# Altium PCB 48V-5V Buck.PcbDoc
Units mil, origin at the board's own origin, x right, y up, seen from the top; angles counter-clockwise.
Board outline 1792.02 x 1443.98 mil, 4 copper layers (L1-TOP, L2-GND, L3-GND, L4-BOT), stack 64.961 mil thick; 33 components, 13 nets, 93 pads, 63 vias.
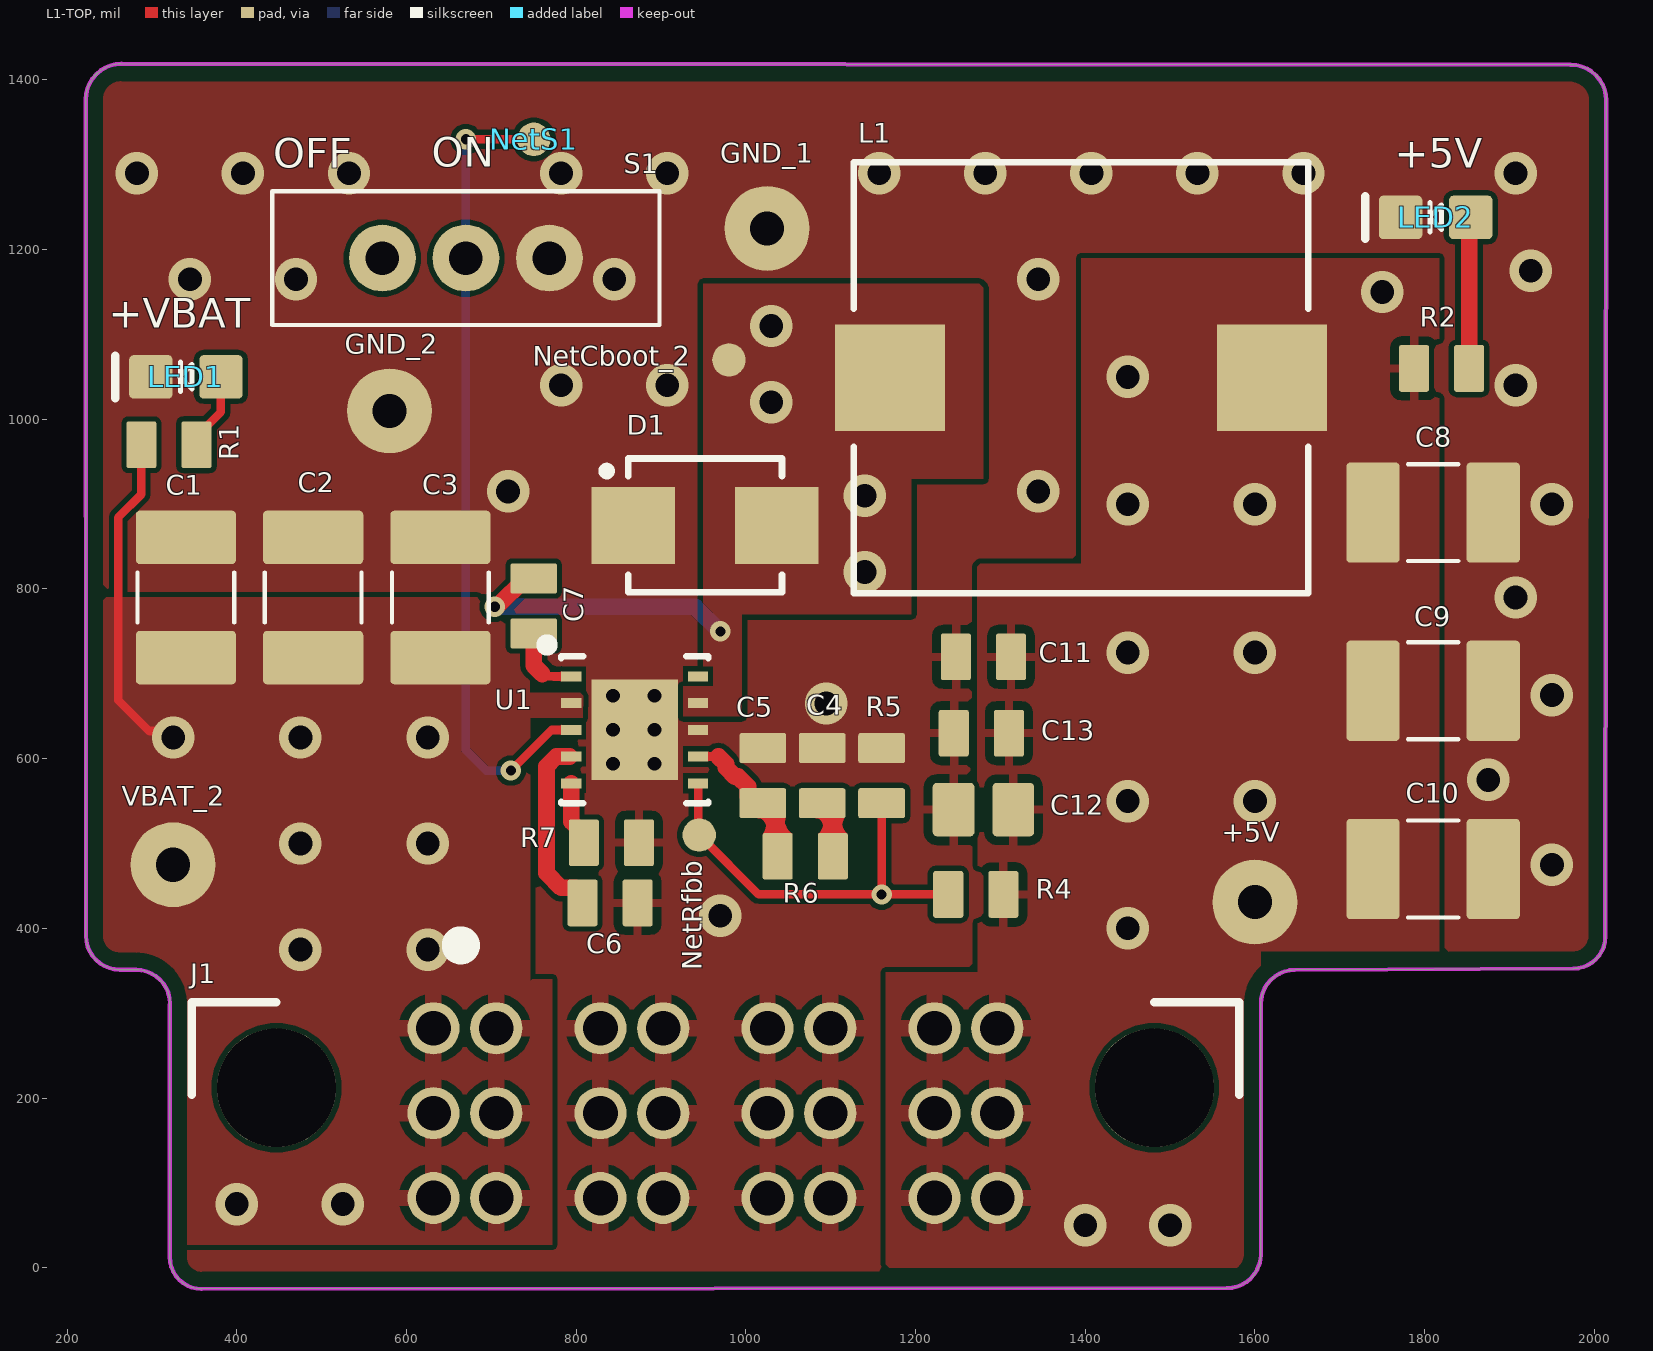
[diagram p0: L1-TOP view]
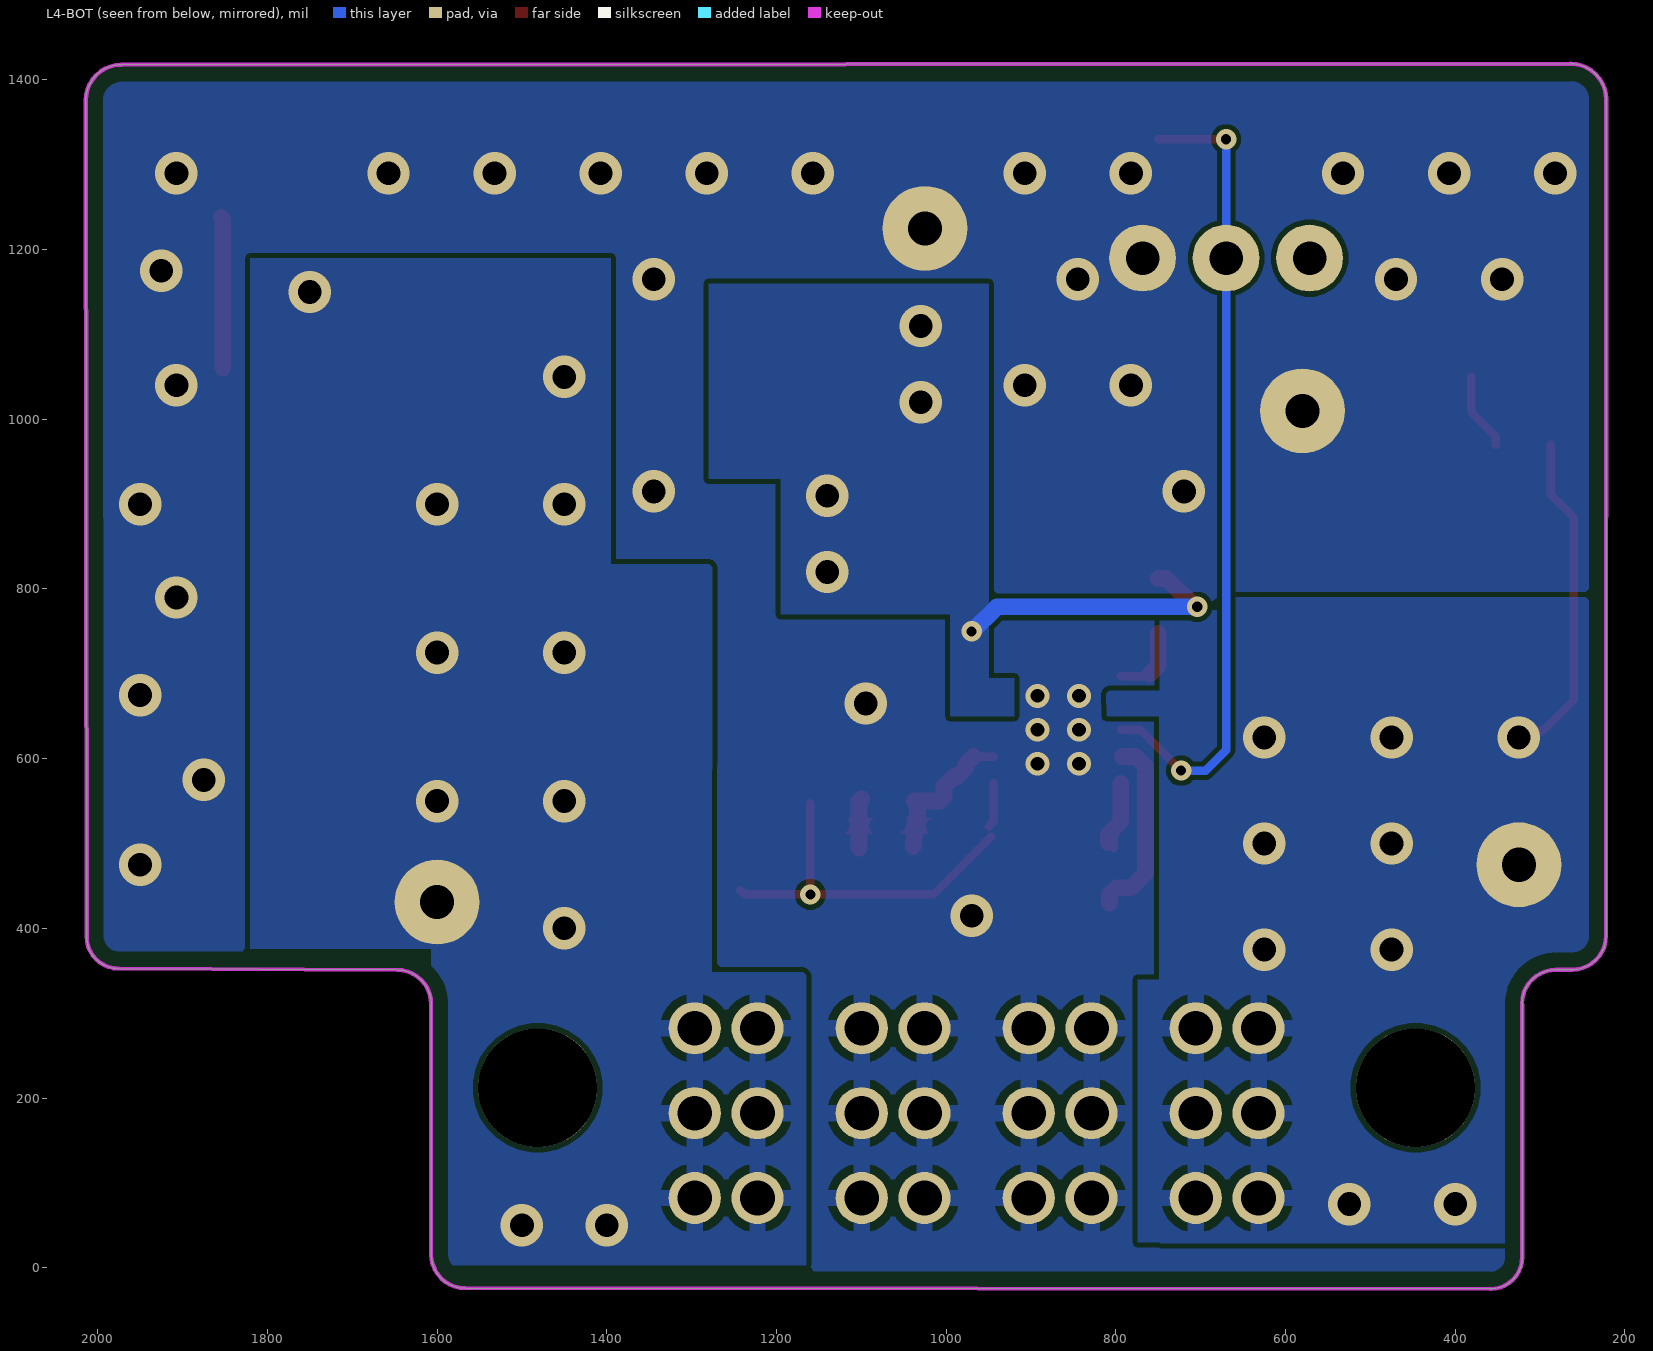
[diagram p1: L4-BOT view, seen from below]
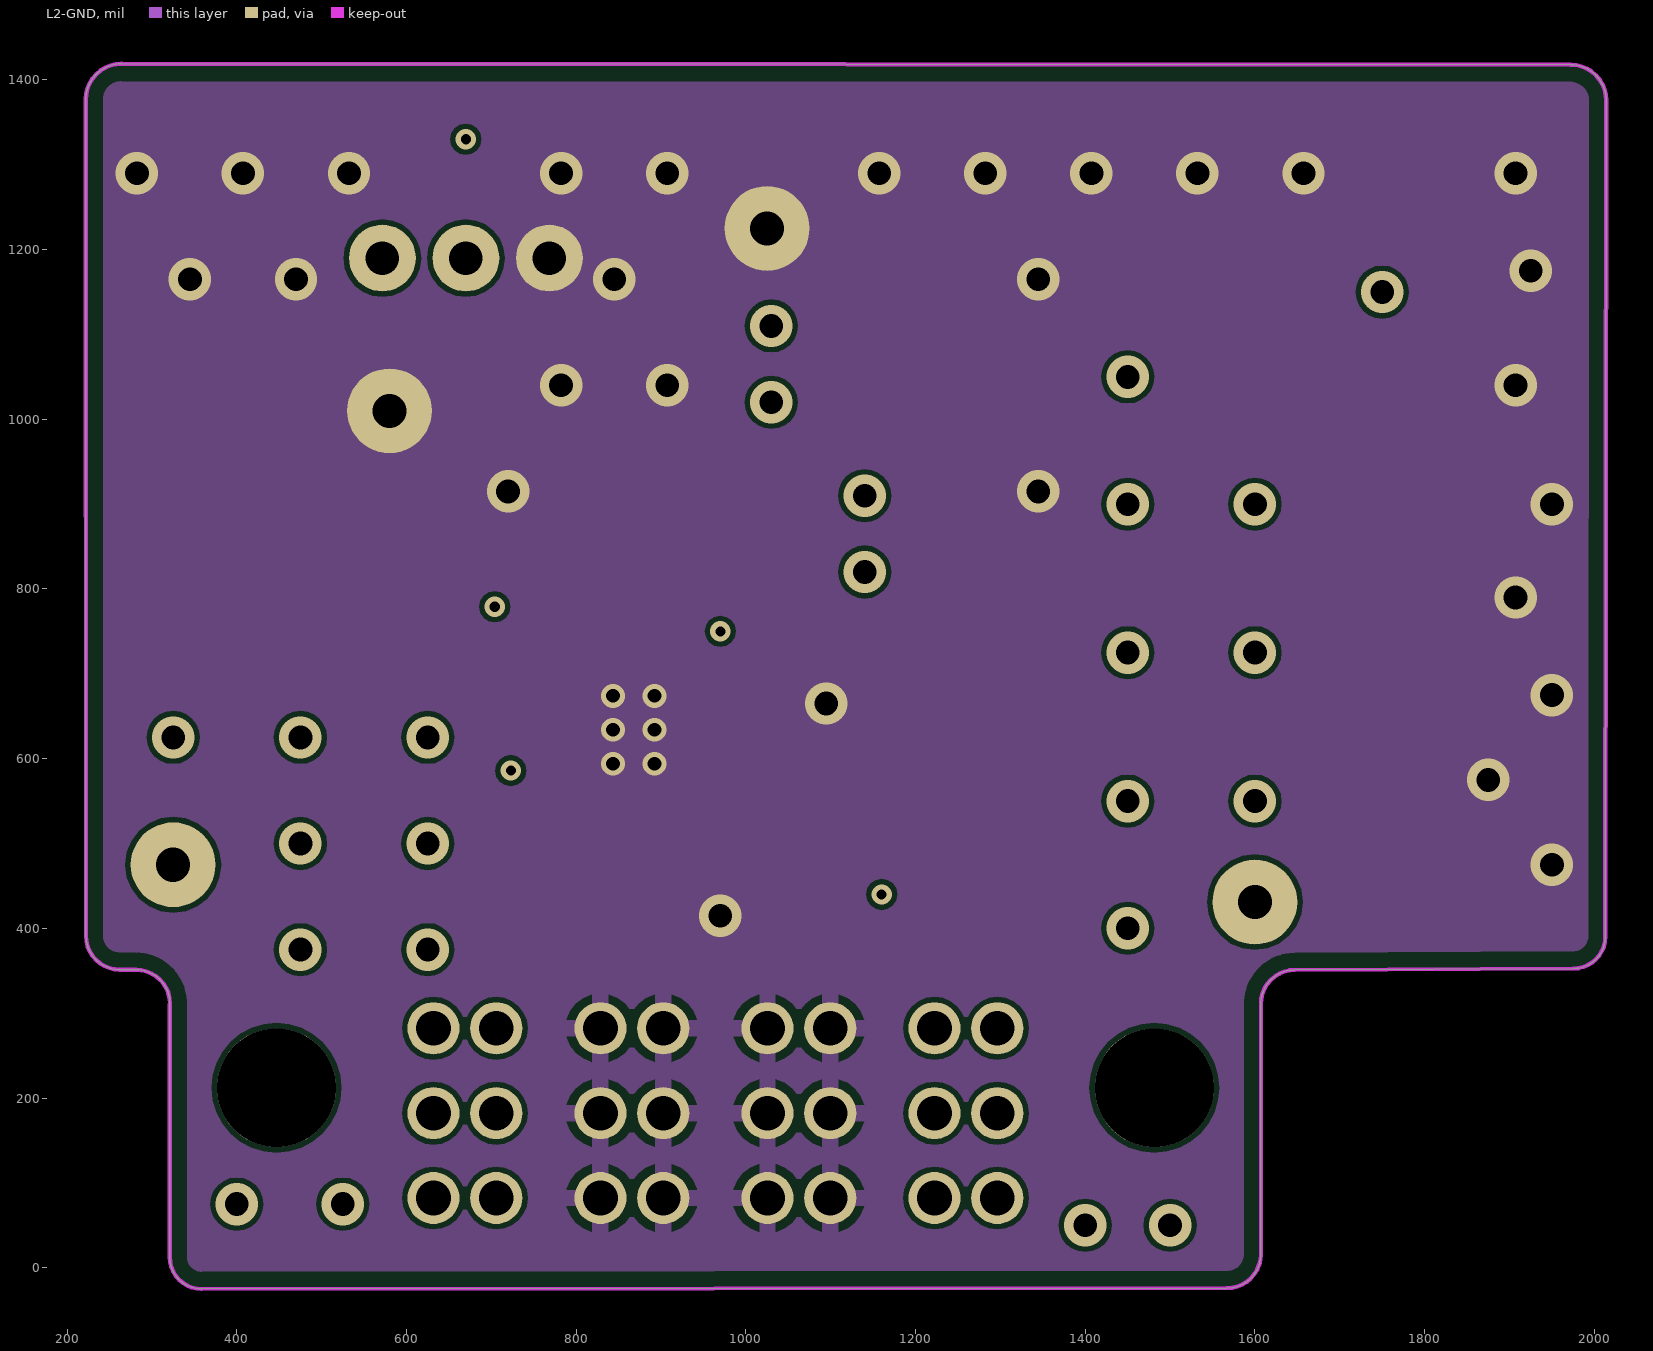
[diagram p2: L2-GND]
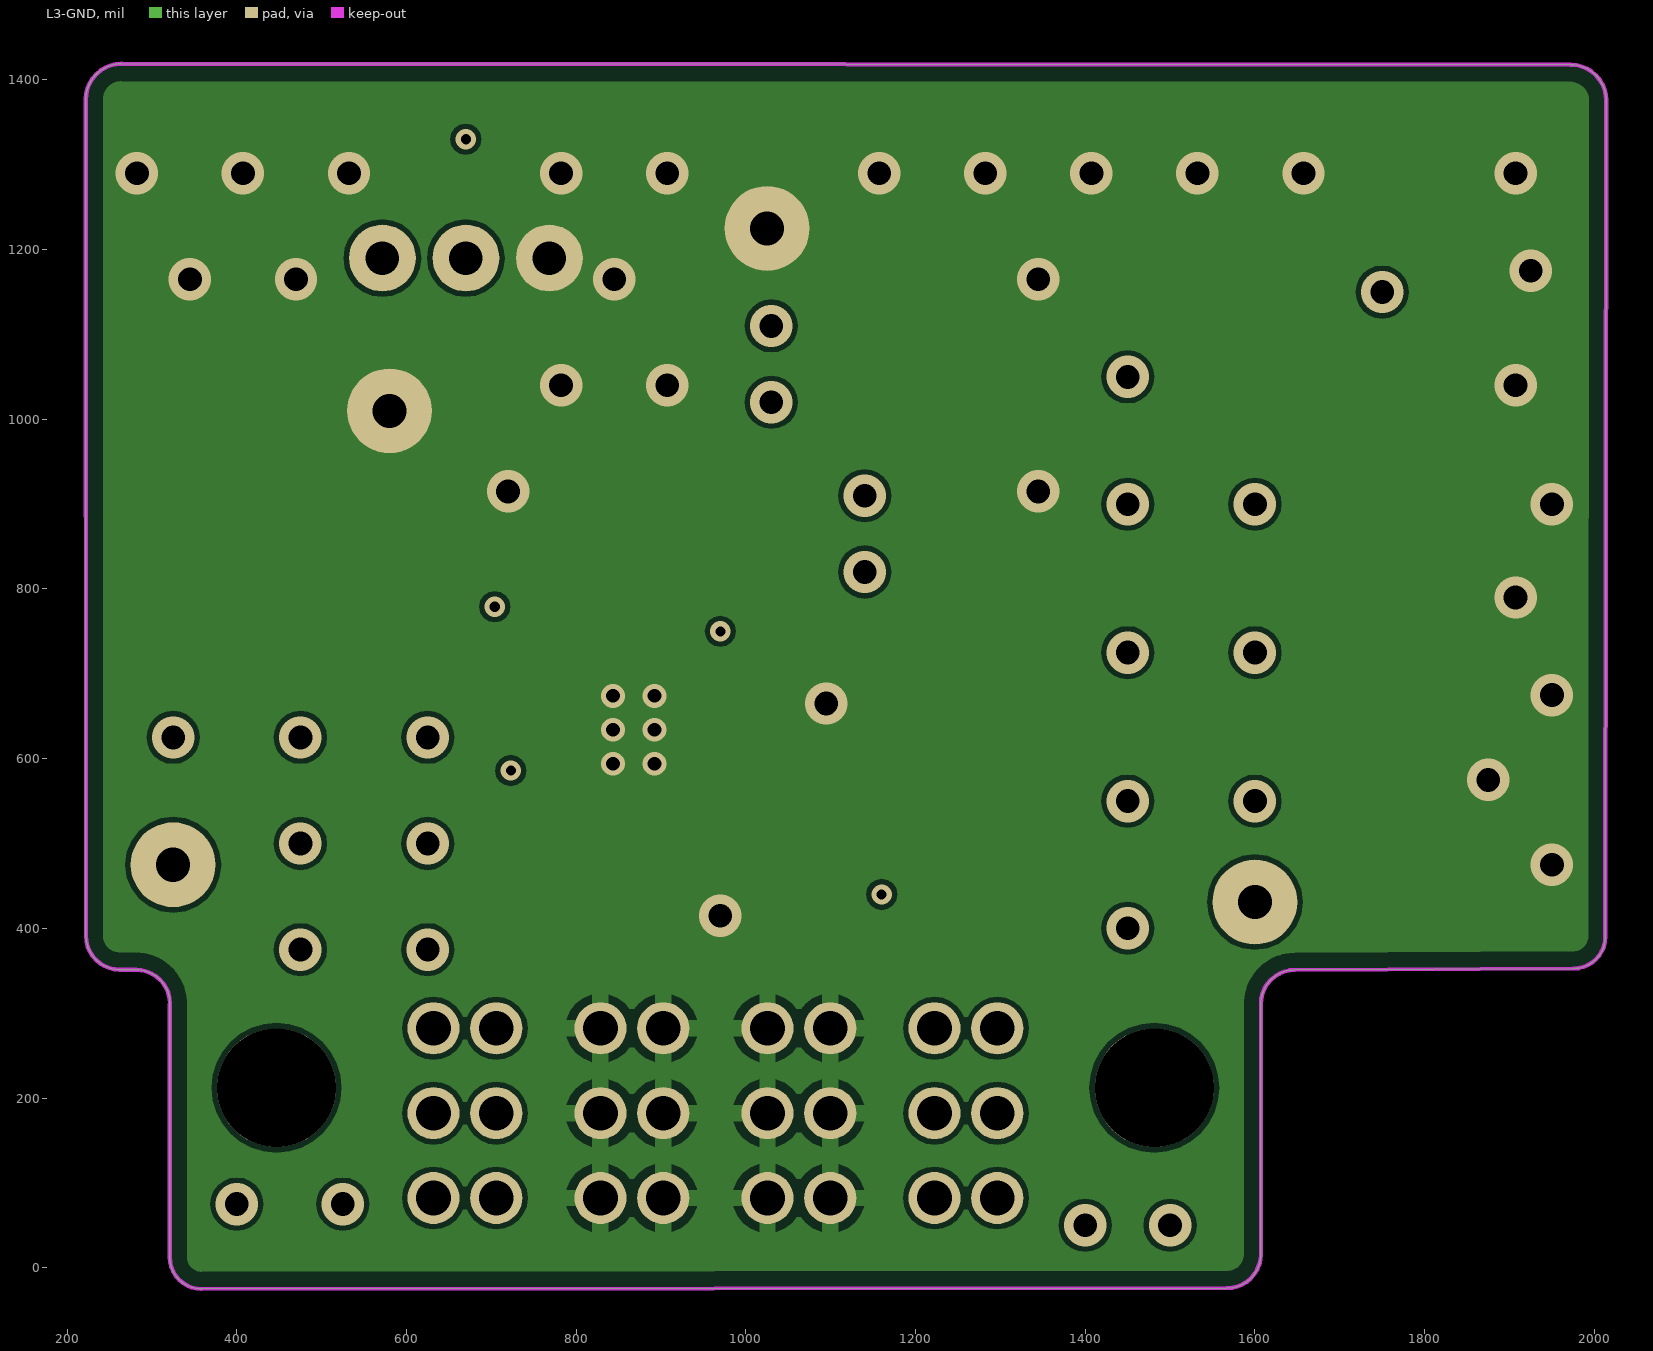
[diagram p3: L3-GND]
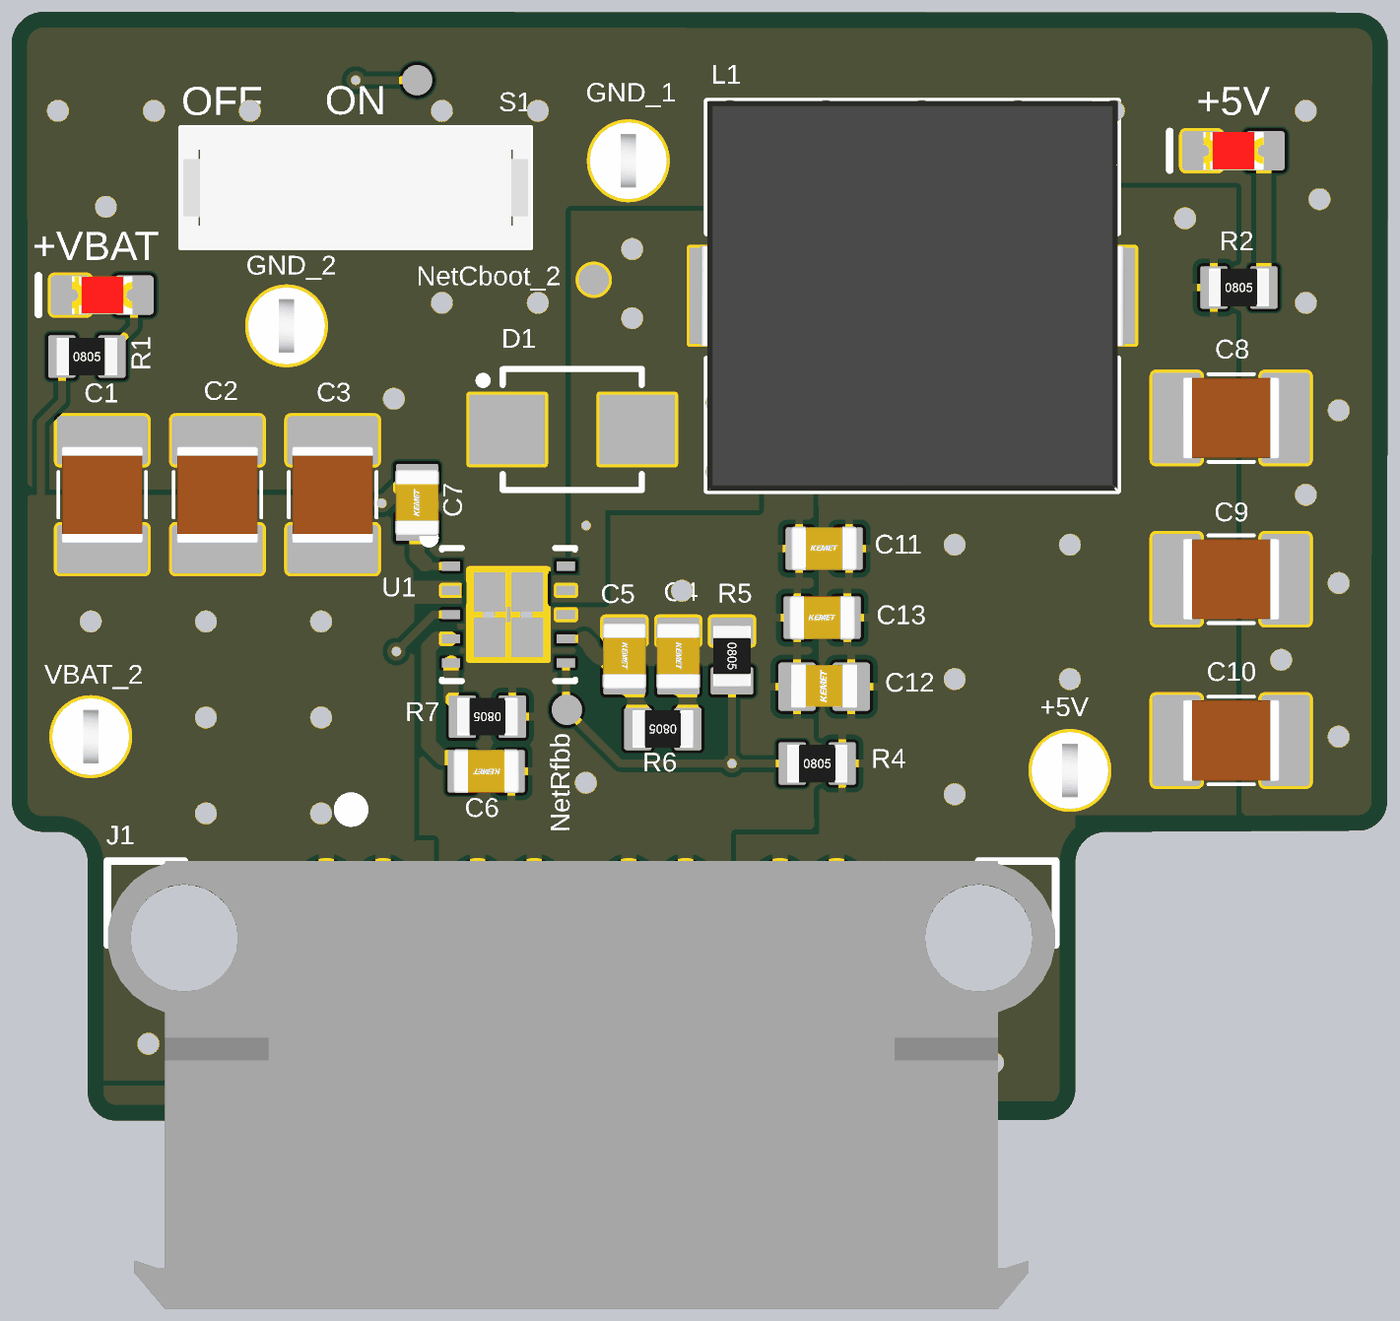
[diagram p4: 3D render of the assembled board from above, using the file's embedded part models]

## Layer stack, top to bottom
Top Solder: solder mask 0.5, Solder Resist, Dk 3.8
L1-TOP: signal copper 2.9531
Dielectric 2: prepreg 7.874, PP-006, Dk 4.6
L2-GND: signal copper 0.689
Dielectric 1: core 41.9291, FR-4, Dk 4.5
L3-GND: signal copper 0.689
Dielectric 3: prepreg 7.874, PP-006, Dk 4.6
L4-BOT: signal copper 2.9531
Bottom Solder: solder mask 0.5, Solder Resist, Dk 3.8

## Board outline
321,12.46 321,310.49 321.24,311.24 ccw(c281.24,311.24) 281.24,351.24 262.24,351.24 cw(c262.24,391.24) 222.25,391.24 222,1377 cw(c264.02,1377) 264.02,1419.03 1972,1418 cw(c1972,1375.98) 2014.02,1375.98 2012.99,390.28 cw(c1975.36,390.28) 1975.36,352.64 1647,351 ccw(c1647,311) 1607,311 1607,16 cw(c1567,16) 1567,-24 358.42,-24.96 cw(c358.42,12.46)

## Design rules (kind name [scope] priority, off if disabled: settings)
BoardOutlineClearance [All] p1: gap=20 ignorepadtopadclearanceinfootprint=FALSE
Clearance [All] p1: gap=6 ignorepadtopadclearanceinfootprint=TRUE
HoleSize [All] p1: absolutevalues=TRUE maxlimit=200 minlimit=1 maxpercent=80.000 minpercent=20.000
MinimumSolderMaskSliver [All] p1: minsoldermaskwidth=1
PlaneConnect [All] p1: pad.planeconnectstyle=Relief pad.reliefexpansion=20 pad.reliefentries=4 pad.reliefconductorwidth=10 pad.reliefairgap=10 via.planeconnectstyle=Direct via.reliefexpansion=20 via.reliefentries=4 via.reliefconductorwidth=10 via.reliefairgap=10
PolygonConnect COMP_NET_DIRECT [(InComponent('C4') OR InComponent('C5') OR InComponent('R5'))] p1: connectstyle=Direct reliefconductorwidth=10 reliefentries=4 polygonreliefangle="90 Angle" airgapwidth=10
PolygonConnect CONN_Releif [InComponent('J1')] p2: connectstyle=Relief reliefconductorwidth=20 reliefentries=4 polygonreliefangle="90 Angle" airgapwidth=10
PolygonConnect PolygonConnect_SMALL [(HasFootprint('CAP0805') OR HasFootprint('CAP0603') OR HasFootprint('RES0603') OR HasFootprint('RES0805') OR HasFootprint('CAP2012') OR HasFootprint('SOD-923') OR HasFootprint('SOD-128'))] p3: connectstyle=Relief reliefconductorwidth=10 reliefentries=4 polygonreliefangle="90 Angle" airgapwidth=10
PolygonConnect PolygonConnect_VIA [IsVIA] p4: connectstyle=Direct reliefconductorwidth=20 reliefentries=4 polygonreliefangle="90 Angle" airgapwidth=10
PolygonConnect [All] p5: connectstyle=Direct reliefconductorwidth=10 reliefentries=4 polygonreliefangle="90 Angle" airgapwidth=10
RoutingVias [All] p1: holewidth=12 width=24 viastyle="Through Hole" minholewidth=12 minwidth=24 maxholewidth=28 maxwidth=50
SilkToSilkClearance [All] p1: silktosilkclearance=1
SilkToSolderMaskClearance [HasFootprint('LED_0805_RED')] p1: minsilkscreentomaskgap=1 clearancetoexposedcopper=TRUE
SolderMaskExpansion SolderMaskExpansion_1 [IsVia] p1: expansion=4 istentingtop=TRUE
SolderMaskExpansion [All] p2: expansion=4 istentingtop=FALSE
Width [All] p1: maxlimit=50 minlimit=6 preferedwidth=6 midlayer1_maxwidth=10 midlayer2_maxwidth=10 minimp=50.000000 maximp=50.000000 favimp=50.000000
25 further rules are at their usual default settings.

## Components (designator, comment, footprint, x,y, rotation, side; value= is the part's Value field where it differs from the comment)
+5V "TESTPOINT_LOOP" TESTPOINT_LOOP 1600,431 r90 top
C1 "CAP_2.2uF_100V_1210_1" CAPC3225X270N 340,790 r270 top value=2.2μF
C2 "CAP_2.2uF_100V_1210_1" CAPC3225X270N 490,790 r270 top value=2.2μF
C3 "CAP_2.2uF_100V_1210_1" CAPC3225X270N 640,790 r270 top value=2.2μF
C4 "CAP_6.8nF_100V_0805" CAP0805 1090,580 r270 top value=6.8nF
C5 "CAP_68pF_50V_0805" CAP0805 1020,580 r270 top value=68pF
C6 "CAP_2.7nF_50V_0805" CAP0805 840,430 r180 top value=2.7nF
C7 "CAP_0.1uF_10V_0805" CAP0805 750,780 r90 top value=0.1uF
C8 "CAP_47uF_16V_1210" CAPC3225X270N 1810,890 r180 top value=47μF
C9 "CAP_47uF_16V_1210" CAPC3225X270N 1810,680 r180 top value=47μF
C10 "CAP_47uF_16V_1210" CAPC3225X270N 1810,470 r180 top value=47μF
C11 "CAP_0.1uF_100V_0805" CAP0805 1280,720 r0 top value=0.1µF
C12 "CAP_1uF_50V_0805" CAP2012 1280,540 r0 top value=1μF
C13 "CAP_4.7uF_50V_0805" CAP0805 1277.52,630 r0 top value=4.7μF
D1 "DIO_SCHOTTKY_100V_5.5A" DIO_SCHOTTKY_45V_5A_vF480mV 952,875 r0 top
GND_1 "TESTPOINT_LOOP" TESTPOINT_LOOP 1025,1225 r90 top
GND_2 "TESTPOINT_LOOP" TESTPOINT_LOOP 580,1010 r90 top
J1 "CON_2POS_SCREW_TERM" MPT-04-01-01-L-RA-SD 964.06,-30 r0 top locked
L1 "IND_8.2uH_8.5A" IND_8.2uH_8.5A 1395,1049 r0 top value=8.2μH
LED1 "LED_RED" LED_0805_RED 340,1050 r180 top
LED2 "LED_RED" LED_0805_RED 1813,1238 r180 top
NetCboot_2 "TESTPOINT_1MM_CIRCLE" TESTPOINT_CIRCLE_1MM 980,1070 r90 top
NetRfbb "TESTPOINT_1MM_CIRCLE" TESTPOINT_CIRCLE_1MM 945,510 r90 top
NetS1 "TESTPOINT_1MM_CIRCLE" TESTPOINT_CIRCLE_1MM 750,1330 r90 top
R1 "RES_9.76kΩ_0805_1%" RES0805 320,970 r0 top value=9.76kΩ
R2 "RES_1kΩ_0805_1%" RES0805 1820,1060 r0 top value=1.07kΩ
R4 "RES_60.4kΩ_0805_1%" RES0805 1271,440 r0 top value="60.5 kΩ"
R5 "RES_11.5kΩ_0805_0.1%" RES0805 1160,580 r270 top value=11.5kΩ
R6 "RES_10kΩ_0805_5%" RES0805 1070,485 r180 top value=10kΩ
R7 "RES_232kΩ_0805_1%" RES0805 841.48,501 r180 top value=232kΩ
S1 "SW_SLIDE_TOGGLE" SW_SLIDE_TOGGLE 670,1190 r180 top
U1 "TPS54561" BUCK_TPS54561DPRR 869,634 r0 top
VBAT_2 "TESTPOINT_LOOP" TESTPOINT_LOOP 325,475 r90 top

## Footprints (in the part's own frame and the unit in brackets; to place one, negate y for a bottom-side part, rotate by r counter-clockwise, add the part's x,y. Pads: shape width x height; smd on the part's side, far side on the other; paste and mask are expansions set on the pad)
BUCK_TPS54561DPRR [mm] "Buck Switching Regulator IC Positive Adjustable 0.8V 1 Output 5A 10-WDFN Exposed Pad"
  rect 0.6x0.3 smd: 1(-1.9,1.6) 2(-1.9,0.8) 3(-1.9,0) 4(-1.9,-0.8) 5(-1.9,-1.6) 6(1.9,-1.6) 7(1.9,-0.8) 8(1.9,0) 9(1.9,0.8) 10(1.9,1.6)
  rect 2.6x3 smd paste-1.245: 11(0,0)
  silkscreen extent -2.7,-2.2 2.2,2.61, body extent -2.05,-2.05 2.05,2.05, height 0.8
CAP0805 [mm] "Chip Capacitor, Body 2.0x1.2mm, Height 0.45mm, IPC Medium Density"
  rrect15% 0.9x1.4 smd: 1(-0.825,0) 2(0.825,0)
  body extent -1.1,-0.73 1.1,0.73, height 1.39
CAP2012 [mm]
  rrect20% 1.25x1.6 smd: 1(-0.895,0) 2(0.895,0)
  body extent -1.1,-0.7 1.1,0.75, height 1.41
CAPC3225X270N [mm]
  rrect15% 1.6x3 smd: 1(-1.8,0) 2(1.8,0)
  silkscreen extent -0.75,-1.45 0.75,1.45, body extent -1.6,-1.35 1.6,1.35, height 2.55
DIO_SCHOTTKY_45V_5A_vF480mV [mm] "Molded Diode, 2-Leads, Body 4.31x3.62mm, IPC Medium Density"
  rect 2.5x2.3 smd: 1(-2.15,0) 2(2.15,0)
  silkscreen extent -3.07,-2 2.3,2, body extent -2.28,-1.97 2.28,1.97, height 2.44
IND_8.2uH_8.5A [mm]
  rect 3.3x3.175 smd: 1(-5.715,0) 2(5.715,0)
  silkscreen extent -6.8,-6.45 6.8,6.45, body extent -7.01,-6.45 7.01,6.45, height 3.5
LED_0805_RED [mm] "SMD, 2-Leads, Body 2x1.25mm"
  rrect20% 1.3x1.3 smd: 1(-1.05,0) 2(1.05,0)
  silkscreen extent -0.18,-0.63 2.11,0.64, body extent -1,-0.62 1,0.63, height 1.12
MPT-04-01-01-L-RA-SD [mm]
  round 1.56 hole 1.04 paste+0: 1(-8.44,2.85) 1(-6.56,2.85) 2(-3.44,2.85) 2(-1.56,2.85) 3(1.56,2.85) 3(3.44,2.85) 4(6.56,2.85) 4(8.44,2.85)
  round 1.56 hole 1.04: 1(-8.44,5.39) 1(-8.44,7.93) 1(-6.56,5.39) 1(-6.56,7.93) 2(-3.44,5.39) 2(-3.44,7.93) 2(-1.56,5.39) 2(-1.56,7.93) 3(1.56,5.39) 3(1.56,7.93) 3(3.44,5.39) 3(3.44,7.93) 4(6.56,5.39) 4(6.56,7.93) 4(8.44,5.39) 4(8.44,7.93)
  round 3.56 hole 3.56 unplated: ""(-13.14,6.15) ""(13.14,6.15)
  silkscreen extent -15.68,5.94 15.68,10.67, body extent -15.68,-6.1 15.68,8.71, height 10.89
RES0805 [mm] "Chip Resistor, 2-Leads, Body 2.00x1.25mm, IPC High Density"
  rrect15% 0.9x1.4 smd: 1(-0.825,0) 2(0.825,0)
  body extent -1,-0.62 1,0.63, height 0.61
SW_SLIDE_TOGGLE [mm]
  round 2 hole 1: 1(-2.5,0) 2(0,0) 3(2.5,0)
  silkscreen extent -5.8,-2 5.8,2, body extent -5.8,-2 5.8,2, height 7
TESTPOINT_CIRCLE_1MM [mm]
  round 1 smd: 1(0,0)
TESTPOINT_LOOP [mm]
  round 2.54 hole 1.02: 1(0,0)
  body extent -1.27,-1.27 1.27,1.27, height 4.57

## Part data
+5V GND_1 GND_2 VBAT_2: "TESTPOINT THRUHOLE", Manufacturer 1="Keystone Electronics", Manufacturer Part Number 1=5002, Package/Footprint=TH, Supplier Part Number 1=36-5002-ND, Mounting Type=TH, Supplier 1=Digi-Key
C1 C2 C3: "CAP CER 2.2UF 100V X7R 1210", Manufacturer 1="TDK Corporation", Manufacturer Part Number 1=C3225X7R2A225K230AB, Package/Footprint=1210, Supplier Part Number 1=445-4497-1-ND, Voltage Rating=100V, Mounting Type=SMD, Supplier 1=Digi-Key
C4: "CAP CER 6800PF 50V C0G/NP0 0805", Manufacturer 1="Murata Electronics", Manufacturer Part Number 1=GRM2195C1H682JA01D, Package/Footprint=0805, Supplier Part Number 1=490-1638-6-ND, Voltage Rating=50V, Supplier 1=Digi-Key
C5: "CAP CER 68PF 50V C0G/NP0 0805", Manufacturer 1="Kyocera AVX", Manufacturer Part Number 1=KGM21BCG1H680JT, Package/Footprint=0805, Supplier Part Number 1=478-KGM21BCG1H680JTDKR-ND, Voltage Rating=50V, Supplier 1=Digi-Key
C6: "CAP CER 2700PF 50V C0G 0805", Manufacturer 1="TDK Corporation", Manufacturer Part Number 1=C2012C0G1H272J060AA, Package/Footprint=0805, Supplier Part Number 1=445-7508-1-ND, Voltage Rating=50V, Supplier 1=Digi-Key
C7: "CAP CER 0.1uF 10V 0805", Manufacturer 1=KEMET, Manufacturer Part Number 1=C0805C104K8RAC7800, Package/Footprint=0805, Supplier Part Number 1=399-C0805C104K8RAC7800DKR-ND, Voltage Rating=10V, Supplier 1=Digi-Key
C8 C9 C10: "CAP CER 47uF 16V X5R 1210", Manufacturer 1="Murata Electronics", Manufacturer Part Number 1=GRM32ER61C476KE15L, Package/Footprint=1210, Supplier Part Number 1=490-6539-6-ND, Voltage Rating=16V, Mounting Type=SMD, Supplier 1=Digi-Key
C11: "CAP CER 0.1UF 100V X7R 0805", Manufacturer 1="TDK Corporation", Manufacturer Part Number 1=C2012X7R2A104K125AA, Package=0805, Supplier Part Number 1=445-1418-1-ND, Voltage Rating=100V, Supplier 1=Digi-Key
C12: "CAP CER 1UF 50V X7R 0805", LCSC Part #=C28323, Manufacturer 1="Samsung Electro-Mechanics", Manufacturer Part Number 1=CL21B105KBFNNNG, Package=0805, Supplier Part Number 1=1276-6470-1-ND, Voltage Rating=50V, Mounting Type=SMD, Supplier 1=Digi-Key
C13: "CAP CER 4.7UF 50V X5R 0805", Dielectric=X5R, LCSC Part #=C1779, Manufacturer 1="TDK Corporation", Manufacturer Part Number 1=CGA4J3X5R1H475K125AB, Package=0805, Supplier Part Number 1=445-7882-1-ND, Voltage Rating=50V, Mounting Type=SMD, Supplier 1=Digi-Key
D1: library part DIO_SCHOTTKY_45V_5A, "DIODE SCHOTTKY 45V 5A DO214AA", Average Rectified Current=5A, Manufacturer 1="Comchip Technology", Manufacturer Part Number 1=CDBB545LR-HF, Package/Footprint=SOD-123, Supplier Part Number 1=641-CDBB545LR-HFTR-ND, Mounting Type=SMD, Supplier 1=Digi-Key, vf(Max)=480mV, Vr (Max)=45V
J1: library part CON_4POS_POWERBLADE_MALE, "CONN HDR 4POS 5MM R/A SLDR", Manufacturer 1="Samtec Inc.", Manufacturer Part Number 1=MPT-04-01-01-L-RA-SD, Package/Footprint="PowerStrip™ 30 MTS", Supplier Part Number 1=SAM9727-ND, Mounting Type=TH, Supplier 1=Digi-Key
L1: "FIXED IND 8.2UH 8.5A 28 MOHM SMD", Current Rating=8.5A, Manufacturer 1="Vishay Dale", Manufacturer Part Number 1=IHLP5050CEER8R2M01, Package/Footprint=SMD, Supplier Part Number 1=541-2596-6-ND, Mounting Type=SMD, Supplier 1=Digi-Key
LED1 LED2: "LED RED DIFFUSED 0805 SMD", Forward Voltage Drop=2V, Manufacturer 1=OSRAM, Manufacturer Part Number 1="LS R976-NR-1", Package/Footprint=0805, Supplier Part Number 1=475-1278-1-ND, Mounting Type=SMD, Supplier 1=Digi-Key
NetCboot_2 NetRfbb NetS1: "TESTPOINT 1MM CIRCLE"
R1: "RES 9.76K OHM 1% 1/8W 0805", Manufacturer 1=YAGEO, Manufacturer Part Number 1=RC0805FR-079K76L, Package/Footprint=0805, Supplier Part Number 1=311-9.76KCRCT-ND, Mounting Type=SMD, Supplier 1=Digi-Key
R2: "RES 1K OHM 1% 1/8W 0805", Manufacturer 1=Yageo, Manufacturer Part Number 1=RC0805FR-071K07L, Package=0805, Supplier Part Number 1=311-1.07KCRCT-ND, Mounting Type=SMD, Supplier 1=Digi-Key
R4: "RES 60.5 kOHM 63 mW 0805", Manufacturer 1="Vishay Dale", Manufacturer Part Number 1=RCS080560K4FKEA, Package/Footprint=0805, Supplier Part Number 1=541-RCS080560K4FKEADKR-ND, Mounting Type=SMD, Supplier 1=Digi-Key
R5: "RES 11.5K OHM 0.1% 1/10W 0805", Manufacturer 1="TE Connectivity Passive Product", Manufacturer Part Number 1=RN73C2A11K5BTDF, Package/Footprint=0805, Supplier Part Number 1=A103292DKR-ND, Mounting Type=SMD, Supplier 1=Digi-Key
R6: "RES 10K OHM 5% 1/8W 0805", LCSC Part #=C17414, Manufacturer 1="Panasonic Electronic Components", Manufacturer Part Number 1=ERJ-6GEYJ103V, Package/Footprint=0805, Supplier Part Number 1=P10KACT-ND, Mounting Type=SMD, Supplier 1=Digi-Key
R7: "RES 232K OHM 1% 1/8W 0805", LCSC Part #=0, Manufacturer 1=Yageo, Manufacturer Part Number 1=RC0805FR-07232KL, Package=0805, Supplier Part Number 1=311-232KCRDKR-ND, Mounting Type=SMD, Supplier 1=Digi-Key
S1: "SWITCH SLIDE SPDT 200MA 30V", Manufacturer 1=E-Switch, Manufacturer Part Number 1=100SP1T1B4M2QE, Package/Footprint=TH, Supplier Part Number 1=EG1903-ND, Voltage Rating (DC)=30V, Mounting Type=TH, Supplier 1=Digi-Key, Throw Configuration=SPDT
U1: "Buck Switching Regulator IC Positive Adjustable 0.8V 1 Output 5A 10-WDFN Exposed Pad", Manufacturer 1="Texas Instruments", Manufacturer Part Number 1=TPS54561DPRR, Package/Footprint="10-WDFN Exposed Pad", Supplier Part Number 1=296-40803-1-ND, Mounting Type=SMD, Supplier 1=Digi-Key

## Via types
v1: diameter 50, hole 28, L1-TOP to L4-BOT, tented both sides, 52 vias
v2: diameter 28, hole 16, L1-TOP to L4-BOT, tented both sides, 6 vias
v3: diameter 24, hole 12, L1-TOP to L4-BOT, tented both sides, 5 vias

## Nets (pads, with @x,y where several pads share a name; then routed paths per layer and width w, separated by ;. In a path a pad name is that pad's centre, name@x,y a point inside that pad or via, vN(x,y) a via of type N, cw(c..) or ccw(c..) an arc to the next point about the centre after c; other vN are vias at no path point)
+5V: +5V.1 C8.2 C9.2 C10.2 C11.2 C12.2 C13.2 J1.4 L1.2 R2.1 R4.2
  other v1: 1400,50 1500,50 1450,400 1450,550 1600,550 1450,725 1600,725 1450,900 1600,900 1450,1050 1750,1150
GND: C1.1 C2.1 C3.1 C4.1 C5.1 C6.1 C8.1 C9.1 C10.1 C11.1 C12.1 C13.1 D1.1 GND_1.1 GND_2.1 J1.2 J1.3 LED1.2 LED2.2 R5.1 R7.1 S1.1 U1.8 U1.11
  other v1: 969.74,415 1950,475 1875,575 1094.74,665 1950,675 1907.24,790 1950,900 719.74,915 1344.74,915 782.24,1040 907.24,1040 1907.24,1040 344.74,1165 469.74,1165 844.74,1165 1344.74,1165 1925,1175 282.24,1290 407.24,1290 532.24,1290 782.24,1290 907.24,1290 1157.24,1290 1282.24,1290 1407.24,1290 1532.24,1290 1657.24,1290 1907.24,1290
  other v2: 843.41,594 892.31,594 843.41,634 892.31,634 843.41,674 892.31,674
NetC4_2: C4.2 R6.1 | length 58.5
  L1-TOP w20: C4.2@1100,552.52 1102.48,550.04 R6.1@1102.48,495
NetC5_2: C5.2 R6.2 U1.7 | length 174.9
  L1-TOP w10: U1.7 967.5,602.5
  L1-TOP w20: 967.5,602.5 976.44,593.56 976.44,589.69 987.37,578.76 990.73,578.76 1002.44,567.05 1002.44,555.24 1007.68,550 C5.2@1037.37,550 ; C5.2@1033.76,546.28 1033.76,535 R6.2@1038.76,496.24
NetC6_2: C6.2 U1.4 | length 220.8
  L1-TOP w19.68: U1.4@792.23,602.5 776.53,602.5 765,590.97 765,465 782.28,447.72 799.65,447.72 807.52,439.84 C6.2
NetC7_1: C7.1 U1.1 | length 87.1
  L1-TOP w10: 760,700 763.01,696.99 U1.1
  L1-TOP w20: C7.1 750,710 760,700
NetC7_2: C7.2 D1.2 L1.1 NetCboot_2.1 U1.9 | length 337.9
  L1-TOP w19.68: v3(704,779) 704.83,779.83 707.5,779.83 740.16,812.48 C7.2
  L4-BOT w19.68: v3(704,779) 940.27,779 969.27,750 v3(970,750)
  other v1: 1140,820 1140,910 1030,1020 1030,1110
NetLED1_1: LED1.1 R1.2 | length 92
  L1-TOP w10: R1.2 352.48,979.84 381.34,1008.7 LED1.1
NetLED2_1: LED2.1 R2.2 | length 178.8
  L1-TOP w19.68: R2.2 1852.48,1236.14 LED2.1
NetNetRfbb_1: NetRfbb.1 R4.1 R5.2 U1.6 | length 486.8
  L1-TOP w10: U1.6 943.8,526.2 NetRfbb.1@950,520 ; NetRfbb.1@947.03,507.97 1015,440 v3(1160,440) ; R5.2 v3(1160,440) ; R4.1@1242.52,445 1237.52,440 v3(1160,440)
NetNetS1_1: NetS1.1 S1.2 U1.3 | length 954
  L1-TOP w10: v3(670,1330) NetS1.1 ; v3(723,586) 771,634 U1.3
  L4-BOT w10: v3(670,1330) S1.2 670,610 694,586 v3(723,586)
NetR7_2: R7.2 U1.5 | length 97.6
  L1-TOP w10: R7.2@802.7,507.3 802.7,494.7 R7.2
  L1-TOP w19.68: U1.5 794.2,525.65 809,510.84 R7.2
VBAT: C1.2 C2.2 C3.2 J1.1 R1.1 U1.2 VBAT_2.1 | length 395.6
  L1-TOP w10: R1.1 287.52,911.73 260,884.21 260,669 296.35,632.65 317.35,632.65 v1(325,625)
  other v1: 400,75 525,75 475,375 625,375 475,500 625,500 475,625 625,625
pads on no net: J1. S1.3 U1.10

## Polygon pours and split planes (outlines as drawn)
GND on L1-TOP "GND_L01_P014" (solid, remove dead copper, pour order 14): 215.22,1522.3 2004.45,1522.3 2004.45,357.57 2007.19,354.82 2002.18,349.8 1600.19,349.8 1600.19,-17.41 1591.61,-26 312,-26 312,340.18 308.79,343.39 226.66,343.39 215.22,354.82
VBAT on L1-TOP "VBAT_L01_P009" (solid, remove dead copper, pour order 9): 320.71,350.01 317.9,352.82 222.22,352.82 222.22,787.78 220,790 745,790 745,678 808.15,678 807.85,648 746,648 746,337.5 748.5,340 772,340 772,27 325.8,27
NetC7_2 on L1-TOP "NONET_L-01_P-001" (solid, remove dead copper, pour order 10): 920,650 920,695 950,695 950,1160 1280,1160 1280,930 1195,930 1195,770 995,770 995,650
+5V on L1-TOP "+5V_L01_P002" (solid, remove dead copper, pour order 2): 1272.5,830 1395,830 1395,1190 1817,1190 1817,373 1607,373 1607,0 1169,0 1165,4 1165,348 1272.36,348 1273.36,349
GND on L4-BOT "GND_L04_P015" (solid, remove dead copper, pour order 15): 222.28,1519 2011.51,1519 2011.51,354.27 2014.25,351.52 2009.24,346.5 1607.25,346.5 1607.25,-20.71 1598.66,-29.3 319.06,-29.3 319.06,336.88 315.85,340.09 233.72,340.09 222.28,351.52
VBAT on L4-BOT "VBAT_L04_P004" (solid, remove dead copper, pour order 4): 320.71,350.01 223.79,350.01 220,353.8 220,790 313.77,790 748,790 748,680 811.15,680 810.85,650 749,650 749,339.5 774,339.5 774,30 748,30 747,29 325.77,29
NetC7_2 on L4-BOT "NONET_L-01_P-001" (solid, remove dead copper, pour order 12): 920,650 920,695 950,695 950,1160 1280,1160 1280,930 1195,930 1195,770 995,770 995,650
+5V on L4-BOT "+5V_L04_P006" (solid, remove dead copper, pour order 6): 1275.51,829 1395,829 1395,1190 1820,1190 1820,376 1607,376 1607,3 1165,3 1165,348 1276.37,348
GND on L2-GND "L2-GND" (solid, remove dead copper, pour order 16): 321,12.46 321,310.49 321.24,311.24 ccw(c281.24,311.24) 281.24,351.24 262.24,351.24 cw(c262.24,391.24) 222.25,391.24 222,1377 cw(c264.02,1377) 264.02,1419.03 1972,1418 cw(c1972,1375.98) 2014.02,1375.98 2012.99,390.28 cw(c1975.36,390.28) 1975.36,352.64 1647,351 ccw(c1647,311) 1607,311 1607,16 cw(c1567,16) 1567,-24 358.42,-24.96 cw(c358.42,12.46)
GND on L3-GND "L3-GND" (solid, remove dead copper, pour order 17): 321,12.46 321,310.49 321.24,311.24 ccw(c281.24,311.24) 281.24,351.24 262.24,351.24 cw(c262.24,391.24) 222.25,391.24 222,1377 cw(c264.02,1377) 264.02,1419.03 1972,1418 cw(c1972,1375.98) 2014.02,1375.98 2012.99,390.28 cw(c1975.36,390.28) 1975.36,352.64 1647,351 ccw(c1647,311) 1607,311 1607,16 cw(c1567,16) 1567,-24 358.42,-24.96 cw(c358.42,12.46)

## Keep-outs
Keep-Out Layer:
  lines w5: 321,310.49 321,12.46 ccw(c358.42,12.46) 358.42,-24.96 1567,-24 ccw(c1567,16) 1607,16 1607,311 cw(c1647,311) 1647,351 1975.36,352.64 ccw(c1975.36,390.28) 2012.99,390.28 2014.02,1375.98 ccw(c1972,1375.98) 1972,1418 264.02,1419.03 ccw(c264.02,1377) 222,1377 222.25,391.24 ccw(c262.24,391.24) 262.24,351.24 281.24,351.24 cw(c281.24,311.24) 321.24,311.24

## Silkscreen, mask and mechanical layers (free items; w line width, h text height)
Top Overlay:
  text "ON" at 630,1285.65 h60
  text "OFF" at 443,1284.65 h60
  text "+5V" at 1765,1284.65 h60
  text "+VBAT" at 249,1096 h60

## Text inside footprints (layer, text, board x,y; h text height)
J1: Mechanical 15 "CONN OVERHANG" at 574.06,-120 h19.68